# Altium PCB RockRTK.PcbDoc (part 8 of 8)
Units mm, origin at the board's own origin, x right, y up, seen from the top; angles counter-clockwise.
Board outline 128 x 72 mm, 6 copper layers (Top Layer, MidLayer1GND, MidLayer2SIG, MidLayer3PWR, MidLayer4GND, Bottom Layer), stack 1.538 mm thick; 400 components, 307 nets, 1795 pads, 1243 vias.
Unrouted connection lines stored in the file: 522.
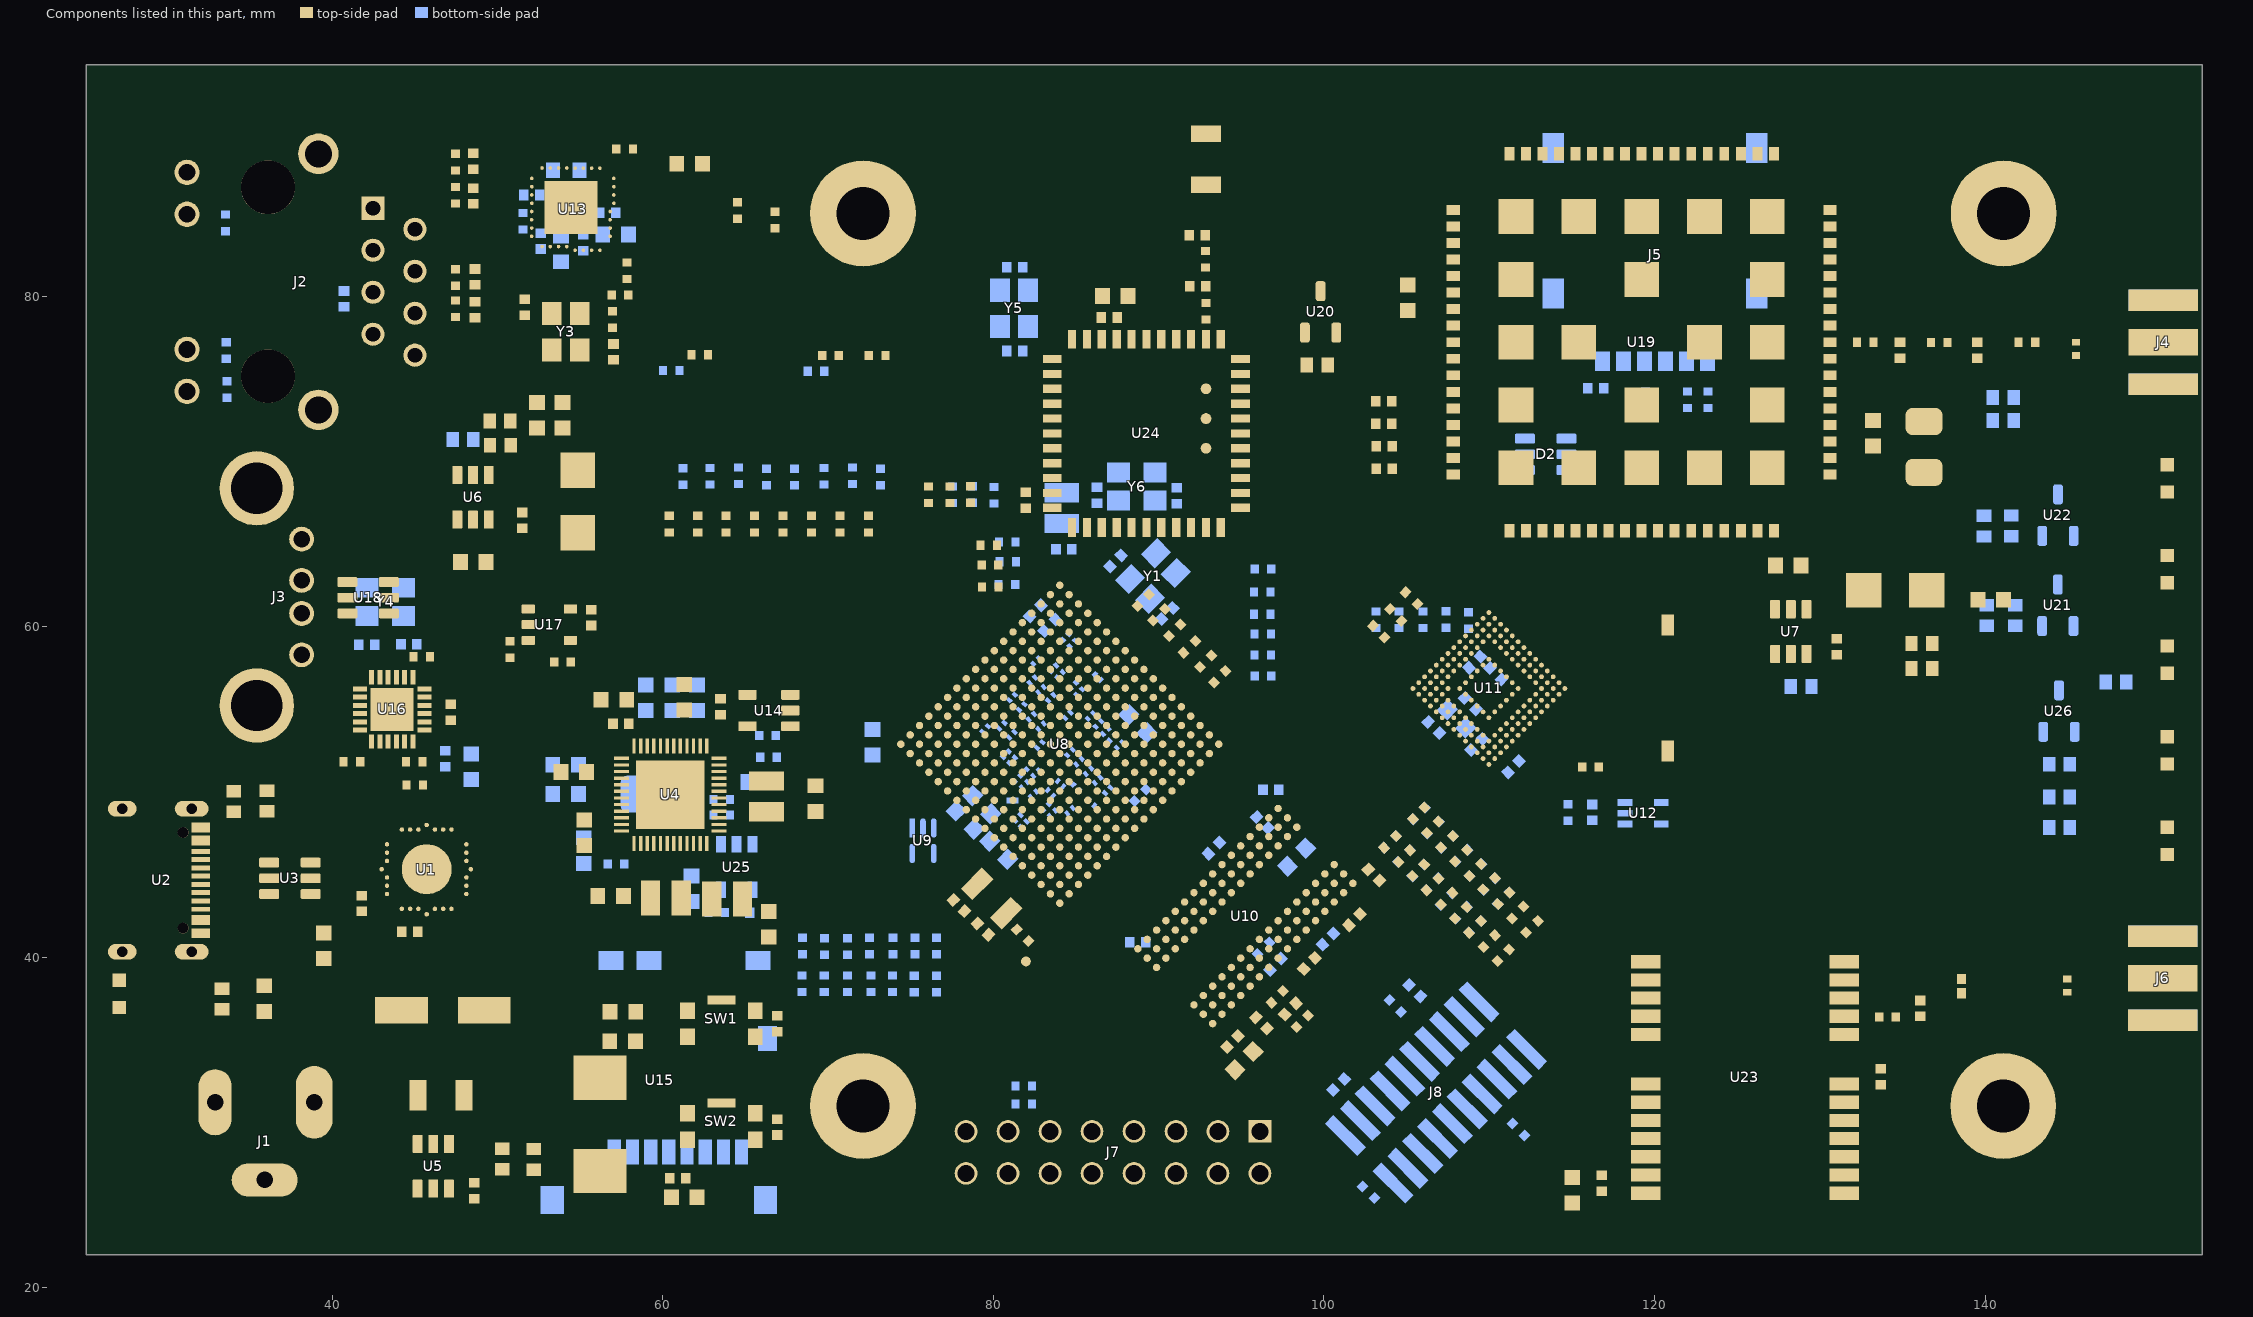
[diagram p11: the components of this part, seen from the top]

## Polygon pours and split planes (outlines as drawn) (continued)
GND on Bottom Layer "Bottom Layer-GND" (solid, pour order 177): 81.4,50.9 82.625,49.675 82.625,49.425 82.8,49.25 83.15,49.25 83.762,48.637 84,48.875 83.275,49.6 83.275,49.775 84.175,50.675 84.375,50.675 84.825,50.225 85.2,50.6 85.25,50.6 85.5,50.35 85.5,49.85 85.575,49.775 85.575,49.45 85.6,49.425 85.325,49.15 85.1,49.15 85,49.25 84.8,49.25 84.6,49.05 84.825,48.825 85.35,48.825 86.5,49.975 85.875,50.6 86.7,49.775 86.85,49.775 86.975,49.9 86.975,50.075 84.475,52.575 84.475,53 84.925,53.45 85.35,53.45 86.675,52.125 87.2,52.125 87.675,52.6 87.675,52.7 85.65,54.725 85.15,54.725 84.9,54.475 83.025,52.6 82.4,51.975 82.275,51.975 82.1,51.8 82.1,51.675 83.025,50.75 83.025,50.55 82.85,50.375 82.6,50.375 81.75,51.225 81.6,51.225 81.4,51.025
GND on Bottom Layer "NONET_L-01_P-001" (solid, pour order 182): 84.35,59.575 84.2,59.725 84.2,59.9 83.5,60.6 83.75,60.85 84.15,60.85 85.45,59.55 85.45,59.325 85.1,58.975 84.95,58.975 84.2,59.725
LDO_3V3 on Bottom Layer "Bottom Layer-LDO_3V3" (solid, pour order 179): 86.75,53.8 87.8,52.75 88.225,52.75 88.375,52.6 88.7,52.6 88.9,52.8 88.9,53.175 88.675,53.4 88.112,53.962 88.25,54.1 87.662,54.688 87.225,54.25 87.1,54.125 86.95,54.125 86.75,53.925
GND on Bottom Layer "NONET_L-01_P-001" (solid, pour order 174): 83.1,56.15 83.675,56.725 83.9,56.725 84.075,56.9 83.45,57.525 83.225,57.525 83,57.75 82.6,57.75 82.375,57.975 82.075,57.675 82.075,57.175
GND on Bottom Layer "NONET_L-01_P-001" (solid, pour order 173): 83.1,52.675 82.725,53.05 82.725,53.35 83.05,53.675 83.05,53.925 81.05,55.925 81.05,56 81.2,56.15 81.3,56.15 82.15,55.3 82.525,55.3 82.95,55.725 83.3,55.725 84.725,54.3
GND on Bottom Layer "NONET_L-01_P-001" (solid, pour order 165): 81.35,51.875 82.125,52.65 82.125,53.225 80.8,54.55 80.35,54.55 79.85,54.55 79.5,54.2 79.5,54 79.725,53.775 79.95,53.775 80.3,54.125 80.575,54.125 81.3,53.4 81.3,53.05 80.725,52.475 81.35,51.85
LDO_3V3 on Bottom Layer "NONET_L-01_P-001" (solid, pour order 164): 81.2,50.95 81.475,51.225 81.475,51.425 80.175,52.725 79.975,52.725 79.675,52.425 79.675,52.25 80.975,50.95 81.1,50.95
VDD_1V5_DDR3L on Bottom Layer "NONET_L-01_P-001" (solid, pour order 163): 87.125,50.05 86.263,50.912 86.725,51.375 87.025,51.375 87.675,50.725 87.675,50.45 87.275,50.05
VDD_1V1_CORE on Bottom Layer "NONET_L-01_P-001" (solid, pour order 162): 85.975,51.225 86.35,51.225 86.7,51.575 86.7,51.9 85.35,53.25 84.975,53.25 84.6,52.875 84.6,52.6
GND on Bottom Layer "GUARD_RING_GND_BOTTOM" (solid, pour order 156): 25.127,94 25.127,91.825 153.127,91.825 153.127,94
GND on Bottom Layer "GUARD_RING_GND_BOTTOM" (solid, pour order 157): 25.127,24.155 25.127,22 153.127,22 153.127,24.155
GND on Bottom Layer "NONET_L-01_P-001" (solid, pour order 152): 152.883,79.197 152.857,79.172 148.692,79.172 148.311,78.791 148.311,75.717 148.692,75.336 152.857,75.336 152.857,74.016 146.837,74.016 145.39,75.463 145.39,79.045 146.787,80.442 152.883,80.442 152.883,79.172
GND on Bottom Layer "NONET_L-01_P-001" (solid, pour order 151): 152.857,40.665 152.832,40.64 148.666,40.64 148.285,40.259 148.285,37.186 148.666,36.805 152.832,36.805 152.832,35.535 146.761,35.535 145.364,36.932 145.364,40.513 146.761,41.91 152.857,41.91 152.857,40.64
GND on Bottom Layer "NONET_L-01_P-001" (solid, pour order 132): 59.925,37.65 59.75,37.475 58.65,37.475 58.45,37.675 58.45,39.925 59.925,39.925
VBUS_IN on Bottom Layer "VBUS_IN_L06_P021" (solid, pour order 21): 54.8,46.3 35.2,46.3 34.1,45.2 34.1,41.8 33.7,41.4 33,41.4 32.6,41.8 32.6,47.5 33.1,48 34.3,48 54.8,48
3V3 on Bottom Layer "NONET_L-01_P-001" (solid, pour order 147): 57.475,82.825 57.7,82.6 58.975,82.6 59.125,82.75 59.125,87.625 58.025,88.725 55.95,88.725 55.225,88 55.225,87.125 55.725,87.125 56.875,85.975 56.875,84.725 57.475,84.125 57.475,83.3
GND on Bottom Layer "NONET_L-01_P-001" (solid, pour order 131): 62.425,41.7 62.625,41.9 62.625,42.15 62.225,42.55 62.225,42.95 61.275,42.95 61.275,42.65 61.125,42.5 60.725,42.5 60.5,42.275 60.5,41.9 60.7,41.7
GND on Bottom Layer "NONET_L-01_P-001" (solid, pour order 129): 53.8,49.4 53.8,52.625 53.4,53.025 52.175,53.025 51.75,52.6 51.75,49.65 52,49.4
GND on Bottom Layer "NONET_L-01_P-001" (solid, pour order 127): 60.55,50.55 60.025,51.075 60.025,51.6 60.275,51.85 62.325,51.85 62.525,51.65 62.525,48 62.325,47.8 60.175,47.8 59.925,48.05 59.925,48.45 60.55,49.075
GND on Bottom Layer "NONET_L-01_P-001" (solid, pour order 126): 55.7,45.3 55.975,45.025 55.975,44.125 55.675,43.825 54.725,43.825 54.425,44.125 54.425,44.975 54.75,45.3 54.75,45.475 55.7,45.475
GND on Bottom Layer "NONET_L-01_P-001" (solid, pour order 125): 48.1,50.3 46.8,50.3 46.525,50.575 46.525,51.8 47.15,51.8 47.375,51.575 47.575,51.575 47.95,51.2 48.1,51.2
GND on Bottom Layer "NONET_L-01_P-001" (solid, pour order 124): 52.475,86.75 52.275,86.55 52.275,85.725 51.825,85.275 51.275,85.275 51.275,84.775 51.825,84.775 52.325,84.275 52.325,83.55 52.3,83.525 56.825,83.525 56.825,84.4 56.475,84.75 56.5,84.775 56.5,85.9 55.65,86.75 53.425,86.75
GND on Bottom Layer "GND_L06_P105" (solid, pour order 105): 62.55,56.9 62.725,57.075 62.725,57.75 62.581,57.894 58.544,57.894 58.325,57.675 58.325,57.075 58.5,56.9
VBUS_IN on Bottom Layer "VBUS_IN_L06_P019" (solid, pour order 19): 54.6,46.3 56.2,46.3 56.6,46.3 56.8,46.5 56.8,47.6 56.4,48 54.6,48
5V_SYS on Bottom Layer "Bottom Layer-5V_SYS" (solid, pour order 45): 54.45,49.4 54.6,49.25 57.525,49.25 57.55,49.275 57.55,50.5 54.6,50.5 54.45,50.35
LDO_3V3 on MidLayer2SIG "LDO_3V3_L03_P081" (solid, pour order 81): 81.275,50.925 80.7,50.925 79.875,51.75 79.875,53.8 80.675,54.6 80.675,55.1 80.675,56.05 82,57.375 82,57.825 82.4,58.225 83.1,58.225 83.15,58.3 84.125,59.275 87.025,59.275 87.725,58.575 87.725,55.275 89.05,53.95 89.05,52.75 88.65,52.35 88.475,52.35 87.175,53.65 87.175,54.875 86.575,55.475 85.625,55.475 85.5,55.6 85.5,56 85.575,56.075 86.35,56.075 86.875,56.6 86.875,58.025 86.4,58.5 84.4,58.5 84.15,58.25 83.95,58.25 82.85,57.15 82.85,56.6 82,55.75 82,51.65
LDO_1V8 on MidLayer2SIG "MidLayer2SIG-LDO_1V8" (solid, pour order 181): 82.7,58.35 82.775,58.275 83,58.275 83.225,58.5 83.225,59.2 83.4,59.375 84.4,59.375 84.5,59.475 84.5,59.825 84.4,59.925 80.975,59.925 77.65,56.6 77.65,55.175 79.275,53.55 79.275,52.975 78.975,52.675 78.975,49.825 80.45,48.35 81.65,48.35 81.975,48.675 82.475,48.675 82.6,48.8 82.6,50 82.157,50.425 80.075,50.425 79.825,50.675 79.825,54.25 80.6,55.025 80.6,55.35 79.825,56.125 79.825,56.725 81.45,58.35
LDO_1V8_RTC on MidLayer2SIG "LDO_1V8_RTC_L03_P080" (solid, pour order 80): 78.875,53.75 79.175,53.625 79.175,53 78.975,52.8 78.975,49.775 80.45,48.3 81.825,48.3 82.125,48.6 82.575,48.6 82.675,48.7 82.675,50.175 82.375,50.475 82.375,50.725 82.375,54.025 82.05,54.35 82.05,55.75 83.675,57.375 83.675,57.95 84,58.275 86.375,58.275 86.85,57.8 86.85,56.775 86.25,56.175 85.525,56.175 85.4,56.05 85.4,55.65 85.625,55.425 86.55,55.425 87.18,54.795 87.18,53.595 88.275,52.5 88.275,51.2 84.575,47.5 79.825,47.5 78.1,49.225 78.1,52.975
5V_SYS on MidLayer2SIG "5V_SYS_L03_P093" (solid, pour order 93): 55.55,49.175 57.2,47.525 59.275,47.525 61.2,45.6 61.45,45.35 62.175,45.35 64.5,47.675 64.5,50.175 64.725,50.4 64.725,50.95 64.525,51.15 64.475,51.15 63.9,51.15 63.875,51.175 62.275,52.775 62.275,53.85 62.075,54.05 60.55,54.05 60.25,53.75 57.4,53.75 55.575,51.875 55.55,51.85 55.55,50.125
VDD_1V1_MPU on MidLayer2SIG "VDD_1V1_MPU_L03_P110" (solid, pour order 110): 66,45.35 66.275,45.625 66.3,45.65 69.325,45.65 71.325,47.65 72.575,47.65 75.3,50.375 75.625,50.375 76.125,49.875 76.125,49.55 69.95,43.375 66.325,43.375 66,43.7
no net on Top Solder "GUARD_RING_MASK_TOP" (solid): 25.127,93.993 25.127,91.834 153.127,91.834 153.127,93.993
GND on Top Solder "GUARD_RING_MASK_TOP" (solid, pour order 153): 25.125,24.155 25.125,21.996 153.127,21.996 153.127,24.155
GND on MidLayer4GND "NONET_L-01_P-001" (solid, pour order 159): 25.125,94 25.125,22 153.125,22 153.125,94
no net on Bottom Solder "GUARD_RING_MASK_BOTTOM" (solid): 25.127,24.155 25.127,21.996 153.131,21.996 153.131,24.155
no net on Bottom Solder "GUARD_RING_MASK_BOTTOM" (solid): 25.127,94.005 25.127,91.85 153.127,91.85 153.127,94.005
GND on MidLayer1GND "NONET_L-01_P-001" (solid, pour order 158): 25.125,94 25.125,22 153.125,22 153.125,94

## Other copper
Top Layer:
  pour cut-out: 83.675,84 101.975,84 101.975,94 83.675,94 83.675,93.9
  pour cut-out: 93.237,84.277 93.336,84.211 93.402,84.112 93.426,83.995 93.426,83.355 93.402,83.238 93.362,83.177 93.386,83.161 93.452,83.062 93.476,82.945 93.476,82.365 93.452,82.248 93.404,82.175 93.452,82.102 93.476,81.985 93.476,81.405 93.452,81.288 93.386,81.189 93.334,81.154 93.361,81.136 93.427,81.037 93.451,80.92 93.451,80.28 93.427,80.163 93.361,80.064 93.347,80.054 93.366,80.041 93.432,79.942 93.456,79.825 93.456,79.325 93.432,79.208 93.366,79.109 93.315,79.075 93.366,79.041 93.432,78.942 93.456,78.825 93.456,78.325 93.432,78.208 93.366,78.109 93.267,78.043 93.265,78.042 93.265,77.374 93.256,77.328 93.242,77.257 93.216,77.194 93.204,77.177 93.15,77.095 93.149,77.095 93.088,77.053 93.05,77.028 92.987,77.002 92.901,76.985 92.87,76.979 92.836,76.985 92.753,77.002 92.689,77.028 92.672,77.04 92.59,77.095 92.549,77.156 92.524,77.194 92.497,77.257 92.483,77.328 92.474,77.374 92.474,78.049 92.384,78.109 92.318,78.208 92.294,78.325 92.294,78.825 92.318,78.942 92.384,79.041 92.435,79.075 92.384,79.109 92.318,79.208 92.294,79.325 92.294,79.825 92.318,79.942 92.384,80.041 92.349,80.064 92.283,80.163 92.259,80.28 92.259,80.92 92.283,81.037 92.349,81.136 92.371,81.151 92.314,81.189 92.248,81.288 92.224,81.405 92.224,81.985 92.248,82.102 92.296,82.175 92.248,82.248 92.224,82.365 92.224,82.945 92.248,83.062 92.312,83.157 92.258,83.238 92.234,83.355 92.234,83.995 92.258,84.112 92.324,84.211 92.423,84.277 92.54,84.301 93.12,84.301
  pour cut-out: 153.142,39.764 153.241,39.698 153.307,39.599 153.331,39.482 153.331,37.882 153.307,37.765 153.241,37.666 153.142,37.6 153.025,37.577 148.825,37.577 148.708,37.6 148.609,37.666 148.543,37.765 148.519,37.882 148.519,38.286 145.455,38.286 145.441,38.266 145.342,38.2 145.225,38.177 144.725,38.177 144.608,38.2 144.509,38.266 144.495,38.286 139.149,38.286 139.144,38.258 139.077,38.158 138.978,38.092 138.861,38.069 138.289,38.069 138.172,38.092 138.073,38.158 138.025,38.23 131.476,38.23 131.429,38.24 131.359,38.254 131.295,38.28 131.278,38.291 131.196,38.346 131.155,38.408 131.13,38.445 131.104,38.509 131.086,38.595 131.08,38.626 131.087,38.659 131.104,38.743 131.13,38.807 131.141,38.824 131.196,38.906 131.258,38.947 131.295,38.972 131.359,38.998 131.429,39.012 131.476,39.022 137.99,39.022 138.006,39.107 138.073,39.206 138.172,39.272 138.289,39.295 138.861,39.295 138.978,39.272 139.077,39.206 139.144,39.107 139.149,39.078 144.495,39.078 144.509,39.098 144.608,39.164 144.725,39.188 145.225,39.188 145.342,39.164 145.441,39.098 145.455,39.078 148.519,39.078 148.519,39.482 148.543,39.599 148.609,39.698 148.708,39.764 148.825,39.788 153.025,39.788
  pour cut-out: 205 vertices and 0 holes, not listed, extent 130.229,76.099 153.356,78.311
MidLayer1GND:
  pour cut-out: 83.725,83.925 102.025,83.925 102.025,93.925 83.725,93.925 83.725,93.825
MidLayer2SIG:
  pour cut-out: 83.675,84 101.975,84 101.975,94 83.675,94 83.675,93.9
MidLayer3PWR:
  pour cut-out: 83.675,84 101.975,84 101.975,94 83.675,94 83.675,93.9
MidLayer4GND:
  pour cut-out: 83.675,83.975 101.975,83.975 101.975,93.975 83.675,93.975 83.675,93.875
Bottom Layer:
  pour cut-out: 83.65,84.025 101.95,84.025 101.95,94.025 83.65,94.025 83.65,93.925

## Silkscreen, mask and mechanical layers (free items; w line width, h text height)
Top Overlay:
  drawing of 28 lines, arcs and shapes, not listed
  text "NETLIGHT" at 142.466,68.231 h1.52
  text "LTE STAT" at 142.941,62.712 h1.52
  text "SD" at 119.302,60.878 h1.52
  text "SOC STAT" at 142.343,57.256 h1.52
  text "Boot Mode" at 122.303,55.252 h1.52
  text "RTK STAT" at 142.586,51.75 h1.52
  text "eMMC" at 118.447,50.028 h1.52
  text "TIMEPULSE" at 141.248,46.322 h1.52
  text "PWR" at 61.525,37.85 h1.52
  text "PWR" at 27.725,36.938 h1.52
  text "RESET" at 61.238,31.663 h1.52
Bottom Overlay:
  lines w0.15: 80.996,48.746 80.563,48.312 81.737,47.137 83.038,48.438 ; 80.996,48.754 80.196,49.554 81.058,50.417 ; 82.554,47.525 82.561,47.945 83.966,46.491 ; 82.575,47.921 82.995,47.914 ; 83.975,43.333 85.694,43.304 ; 83.975,43.35 83.975,46.525 89.425,46.525 89.425,43.727 89.425,42.084 86.473,42.084 86.473,43.3 85.697,43.3 ; 81.1,57 87.888,50.213 ; 81.1,57 77.787,53.688 84.575,46.9 87.888,50.213 ; 81.1,57 87.888,50.212 ; 81.1,57 84.425,60.325 91.213,53.538 87.888,50.212
  lines w0.2: 80.996,48.746 80.996,48.754 ; 92.75,65.425 111.1,65.425 111.1,75.4 92.75,75.4 92.75,65.425 ; 115.6,33.675 137.425,33.675 137.425,45.525 115.6,45.525 115.6,33.675
  text "1" at 110.671,65.804 h1
  text "1" at 87.875,50.734 h1 r315
  text "2" at 84.6,47.284 h1 r315
  text "2" at 137.096,34.004 h1
Top Solder:
  pour cut-out: 83.675,84 101.975,84 101.975,94 83.675,94 83.675,93.9
Bottom Solder:
  pour cut-out: 83.675,84.025 101.975,84.025 101.975,94.025 83.675,94.025 83.675,93.925
Mechanical 1:
  the board outline again, w0.254

## Text inside footprints (layer, text, board x,y; h text height)
U2: Mechanical 13 "PCB Edge" at 25.409,39.452 h0.61 r270